# EAGLE board dualsmartplug (EAGLE 6.6.0)
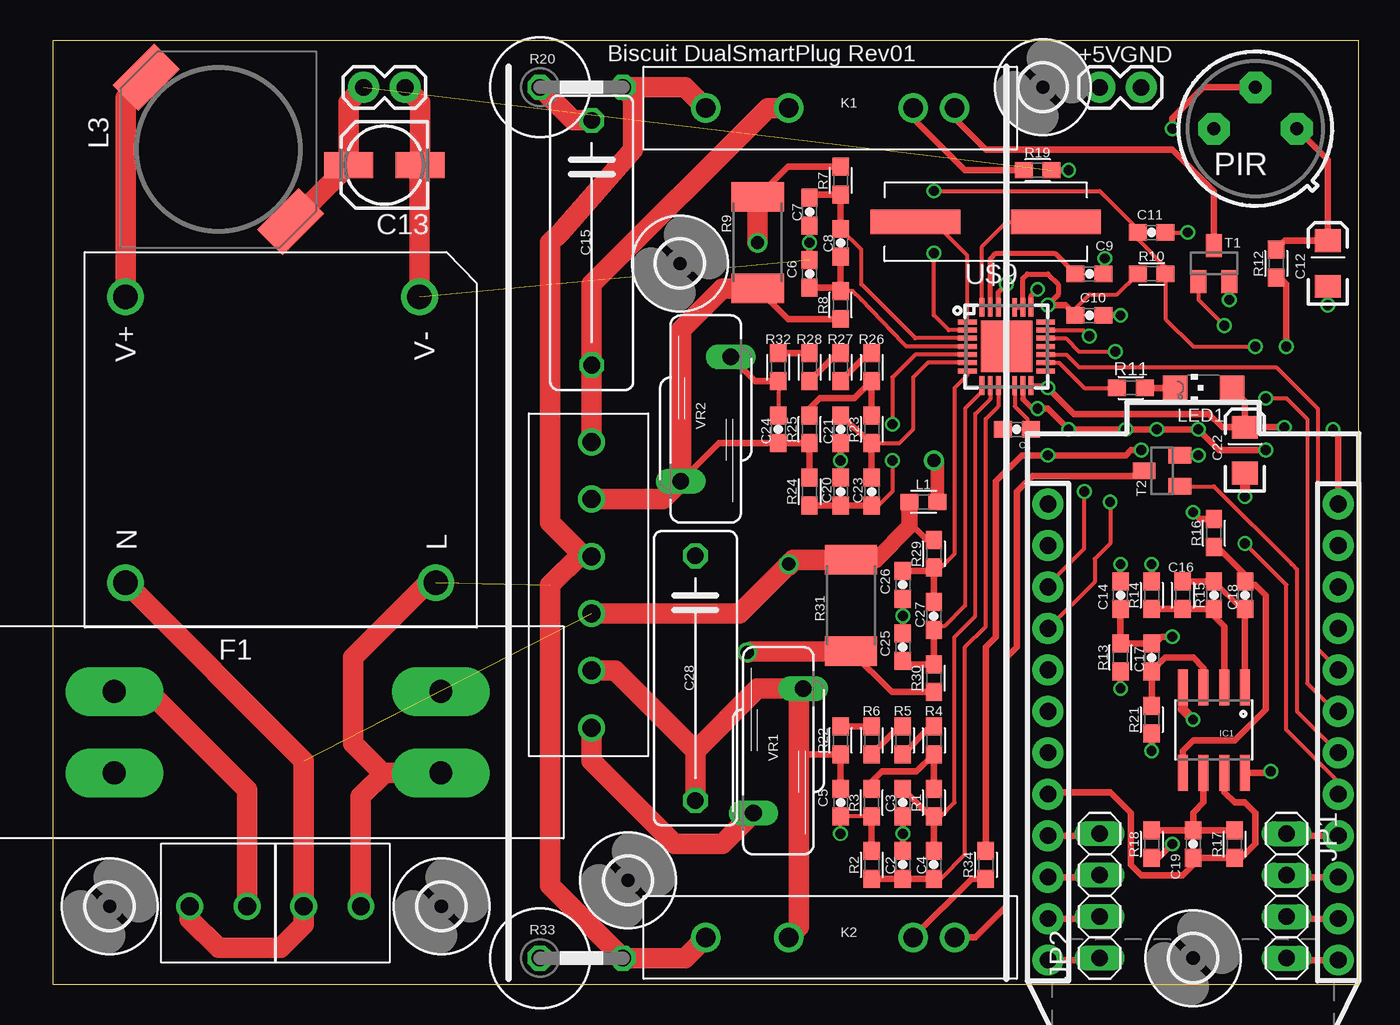
[diagram p0: board, top side]
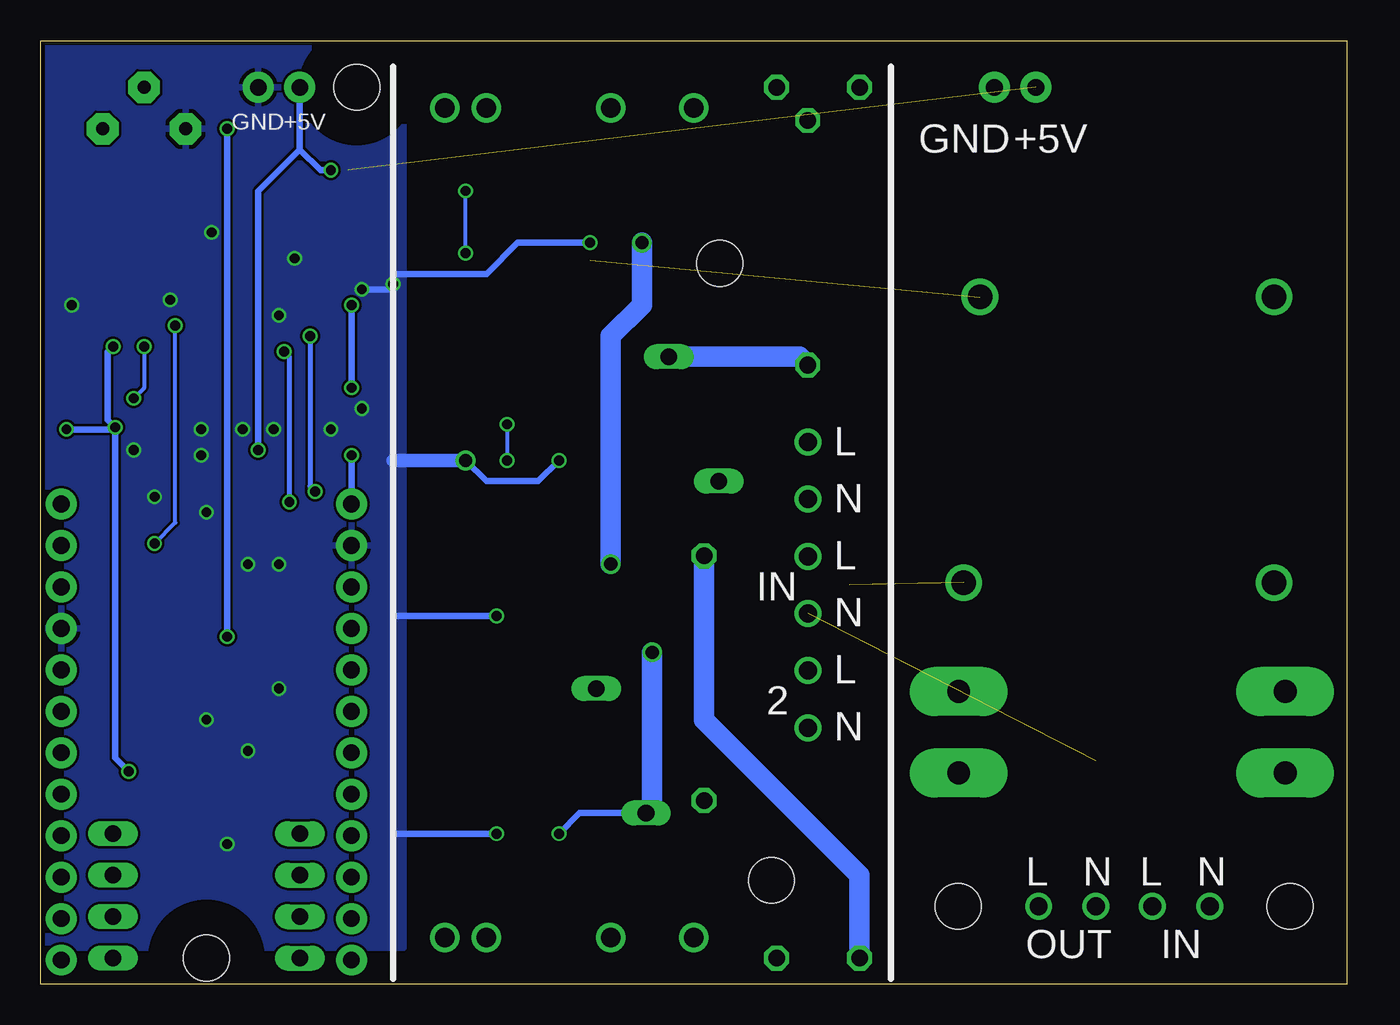
[diagram p1: board, bottom side, seen from below]

Size 79.99 x 57.77 mm. Coordinates in mm from the lower left corner, seen from the top.
Outline: 0,0 79.99,0 79.99,57.77 0,57.77 0,0
Copper layers (1*16): Top 0.035mm / dielectric 1.5mm / Bottom 0.035mm
Design rules "Fusion_eagle_rule_v1.1": minimum track width 6mil, minimum drill 12mil, track to track 6mil, track to pad 6mil, pad to pad 6mil, via to via 6mil, smd to smd 0mil, copper to edge 10mil, drill to drill 10mil, minimum pad ring 10mil, minimum via ring 6mil, stop-mask expansion 2mil, vias tented up to drill 100mil, thermal gap 10mil

## Footprints (pad centres in the part's own frame; a part is rotated, then mirrored left to right if it is on the bottom)
0603-CAP = smd 1.1 x 1: 1 -0.85,0; 2 0.85,0
EIA3216 = smd 1.4 x 1.6: A 1.4,0; C -1.4,0
153CLV-0505 = smd 3 x 1.6: + 2.2,0; - -2.2,0
C150-054X183 = drill 1.016 octagon: 1 -7.493,0; 2 7.493,0
SHURTER = drill 1.4 pad 3 long: P$5 -14,3; P$6 -14,-2; P$7 6,-2; P$8 6,3
SO08 = smd 0.61 x 2.21: 1 -1.905,-2.616; 2 -0.635,-2.616; 3 0.635,-2.616; 4 1.905,-2.616; 5 1.905,2.616; 6 0.635,2.616; 7 -0.635,2.616; 8 -1.905,2.616
1X04 = drill 1.016 long: 1 -3.81,0; 2 -1.27,0; 3 1.27,0; 4 3.81,0
1X02 = drill 1.016 pad 1.88: 1 0,0; 2 2.54,0
S216S02F = drill 1.2: 1 -8.89,0; 2 -3.81,0; 3 3.81,0; 4 6.35,0
0603 = smd 1.1 x 1: 1 -0.85,0; 2 0.85,0
ELLCTP = smd 3.6 x 2.2 rotated 315: 1 -4.428,-4.421; 2 4.411,4.418
CHIPLED_1206 = smd 1.5 x 1.5: A 0,-1.75; C 0,1.75
PIR_IRA-E700ST0 = drill 0.813 pad 1.93 octagon: DRAIN+ 2.54,0; GND -2.54,0; SOURCE 0,2.54
R2512 = smd 1.8 x 3.2: 1 -2.8,0; 2 2.8,0
0617V = drill 1.016 octagon: 1 -2.54,0; 2 2.54,0
SOT23 = smd 1 x 1.4: 1 -0.95,-1.1; 2 0.95,-1.1; 3 0,1.1
2,8 = hole 2.8: 0,0
PHOTON = drill 1.016 pad 1.88: 1 1.27,32.258; 2 1.27,29.718; 3 1.27,27.178; 4 1.27,24.638; 5 1.27,22.098; 6 1.27,19.558; 7 1.27,17.018; 8 1.27,14.478; 9 1.27,11.938; 10 1.27,9.398; 11 1.27,6.858; 12 1.27,4.318; 13 19.05,4.318; 14 19.05,6.858; 15 19.05,9.398; 16 19.05,11.938; 17 19.05,14.478; 18 19.05,17.018; 19 19.05,19.558; 20 19.05,22.098; 21 19.05,24.638; 22 19.05,27.178; 23 19.05,29.718; 24 19.05,32.258
VTX-214-001 = drill 1.5: P$L -8.75,-9.5; P$N -8.75,9.5; P$V+ 8.75,9.5; P$V- 8.75,-8.5
QFN28-5X5 = smd 1.15 x 0.3: P$1 -2.4,1.5; P$2 -2.4,1; P$3 -2.4,0.5; P$4 -2.4,0; P$5 -2.4,-0.5; P$6 -2.4,-1; P$7 -2.4,-1.5; P$15 2.4,-1.5; P$16 2.4,-1; P$17 2.4,-0.5; P$18 2.4,0; P$19 2.4,0.5; P$20 2.4,1; P$21 2.4,1.5 | smd 0.3 x 1.15: P$8 -1.5,-2.4; P$9 -1,-2.4; P$10 -0.5,-2.4; P$11 0,-2.4; P$12 0.5,-2.4; P$13 1,-2.4; P$14 1.5,-2.4; P$22 1.5,2.4; P$23 1,2.4; P$24 0.5,2.4; P$25 0,2.4; P$26 -0.5,2.4; P$27 -1,2.4; P$28 -1.5,2.4 | smd 3.15 x 3.15: P$29 0,0
S10K250 = drill 1.016 long: 1 -1.524,-3.81; 2 1.524,3.81
MOLEX-39357-6 = drill 1.1: P$1 -8.75,0; P$2 -5.25,0; P$3 -1.75,0; P$4 1.75,0; P$5 5.25,0; P$6 8.75,0
MOLEX-39357 = drill 1.1: P$1 -1.75,0; P$2 1.75,0
CRYSTAL-SMD-10.5X4.8-2PIN = smd 5.5 x 1.5: P$1 -4.3,0; P$2 4.3,0

## Placement (x,y rotation side)
C1  100nF  [0603-CAP]  59.05,33.97 180 top
C2  220pF  [0603-CAP]  52.07,7.3 270 top
C3  220pF  [0603-CAP]  52.07,11.11 270 top
C4  22nF  [0603-CAP]  53.98,7.3 270 top
C5  10nF  [0603-CAP]  48.26,11.11 270 top
C6  220pF  [0603-CAP]  46.36,43.5 270 top
C7  220pF  [0603-CAP]  46.36,47.31 270 top
C8  22nF  [0603-CAP]  48.26,45.4 270 top
C9  100nF  [0603-CAP]  63.5,43.5 180 top
C10  100nF  [0603-CAP]  63.5,40.96 180 top
C11  100nF  [0603-CAP]  67.31,46.04 180 top
C12  10uF  [EIA3216]  78.1,44.13 90 top
C13  47uF  [153CLV-0505]  20.32,50.16 180 top
C14  1nF  [0603-CAP]  65.4,23.81 90 top
C15  100n  [C150-054X183]  33.02,45.4 270 top
C16  15nF  [0603-CAP]  71.12,23.81 90 top
C17  1uF  [0603-CAP]  67.31,20 270 top
C18  1uF  [0603-CAP]  73.02,23.81 270 top
C19  15nF  [0603-CAP]  69.85,8.57 270 top
C20  220pF  [0603-CAP]  48.26,30.16 270 top
C21  220pF  [0603-CAP]  48.26,33.97 270 top
C22  10uF  [EIA3216]  73.02,32.7 90 top
C23  22nF  [0603-CAP]  50.16,30.16 270 top
C24  10nF  [0603-CAP]  44.45,33.97 270 top
C25  220pF  [0603-CAP]  52.07,20.64 270 top
C26  220pF  [0603-CAP]  52.07,24.45 270 top
C27  22nF  [0603-CAP]  53.98,22.54 270 top
C28  100n  [C150-054X183]  39.37,18.73 270 top
F1  T15A 1 1/4"  [SHURTER]  17.78,14.92 0 top
IC1  MCP6022  [SO08]  71.12,15.56 180 top
JP1  [1X04]  75.56,5.4 270 top
JP2  [1X04]  64.13,5.4 90 top
JP3  [1X02]  64.13,54.93 0 top
JP6  [1X02]  19.05,54.93 0 top
K1  S216S02FA  [S216S02F]  48.9,53.66 0 top
K2  S216S02FA  [S216S02F]  48.9,2.86 0 top
L1  INDUCTOR  [0603]  53.34,29.53 180 top
L3  5u6  [ELLCTP]  10.16,51.12 270 top
LED1  [CHIPLED_1206]  70.48,36.51 90 top
PIR  PIR_IRA-E700ST0  [PIR_IRA-E700ST0]  73.66,52.39 0 top
R1  1K  [0603]  53.98,11.11 270 top
R2  1K  [0603]  50.16,7.3 270 top
R3  1K  [0603]  50.16,11.11 90 top
R4  422K  [0603]  53.98,14.92 270 top
R5  422K  [0603]  52.07,14.92 270 top
R6  422K  [0603]  50.16,14.92 270 top
R7  1K  [0603]  48.26,49.21 270 top
R8  1K  [0603]  48.26,41.59 90 top
R9  0R002 2W 1%  [R2512]  43.18,45.4 90 top
R10  10K  [0603]  67.31,43.5 0 top
R11  100R  [0603]  66.04,36.51 0 top
R12  220K  [0603]  74.93,44.13 270 top
R13  470K  [0603]  65.4,20 90 top
R14  10K  [0603]  67.31,23.81 270 top
R15  150K  [0603]  69.21,23.81 270 top
R16  1M  [0603]  71.12,27.62 90 top
R17  150K  [0603]  72.39,8.57 90 top
R18  10K  [0603]  67.31,8.57 270 top
R19  220R  [0603]  60.33,49.85 180 top
R20  47R  [0617V]  32.38,54.93 0 top
R21  1M  [0603]  67.31,16.19 270 top
R22  422K  [0603]  48.26,14.92 90 top
R23  1K  [0603]  50.16,33.97 270 top
R24  1K  [0603]  46.36,30.16 270 top
R25  1K  [0603]  46.36,33.97 90 top
R26  422K  [0603]  50.16,37.78 270 top
R27  422K  [0603]  48.26,37.78 270 top
R28  422K  [0603]  46.36,37.78 270 top
R29  1K  [0603]  53.98,26.35 270 top
R30  1K  [0603]  53.98,18.73 90 top
R31  0R002 2W 1%  [R2512]  48.9,23.18 90 top
R32  422K  [0603]  44.45,37.78 90 top
R33  47R  [0617V]  32.38,1.59 0 top
R34  220R  [0603]  57.15,7.3 270 top
T1  BC846  [SOT23]  71.12,44.13 0 top
T2  BC846  [SOT23]  67.94,31.43 90 top
U$1  [2,8]  38.42,44.13 0 top
U$2  PHOTON_WITH_HEADERS  [PHOTON]  59.69,-2.86 0 top
U$4  [2,8]  23.81,4.76 0 top
U$5  [2,8]  3.49,4.76 0 top
U$6  VTX-214-001  [VTX-214-001]  13.97,33.34 90 top
U$7  [2,8]  60.64,54.93 0 top
U$8  [2,8]  69.85,1.59 0 top
U$9  CS5484  [QFN28-5X5]  58.42,39.05 0 top
U$10  [2,8]  35.24,6.35 0 top
VR1  S10K250  [S10K250]  44.45,14.29 0 top
VR2  S10K250  [S10K250]  40.01,34.61 0 top
X1  [MOLEX-39357-6]  33.02,24.45 270 top
X2  [MOLEX-39357]  17.13,4.76 180 top
X5  [MOLEX-39357]  10.16,4.76 180 top
Y1  4.096MHz  [CRYSTAL-SMD-10.5X4.8-2PIN]  57.15,46.67 180 top

## Library data of the parts
C1-C12 C20-C27 JP3 JP6 = SparkFun
C13 C15 C28 = rcl
C14 C16-C19 IC1 PIR U$2 U$9 = smartplug
F1 = smartplug; FARNELL_OC: 1162725; MPN: 0031.8231
JP1 JP2 = pinhead
K1 K2 = smartplug; FARNELL_OC: 1618480; MANUF_PART#: S216S02F; MOUSER_OC: 852-S216S02F
L1 R1-R8 R10-R19 R21-R30 R32 R34 U$6 X1 X2 X5 = Rebel
L3 = eva
LED1 = led
R9 R31 = SparkFun; FARNELL_OC: 2321760; MANUF_PART#: CRF2512-FV-R002ELF
R20 R33 = resistor
T1 T2 = transistor-neu-to92
U$1 U$4 U$5 U$7 U$8 U$10 = holes
VR1 VR2 = varistor; FARNELL_OC: 1004355; MANUF_PART#: B72210S0251K101
Y1 = SparkFun; FARNELL_OC: 2467740; MANUF_PART#: ABLS2-4.096MHZ-D4Y-T

## Nets
!CS_RST: C11.2 R10.2 U$2.19 U$9.P$2
!RELAY1: T1.1 U$2.17
!RELAY2: T2.1 U$2.18
+3V3: C10.2 C22.A IC1.8 LED1.A R10.1 R12.2 U$2.24 U$9.P$14 U$9.P$23 U$9.P$24
+5V: C13.+ JP3.1 JP6.1 L3.2 R19.1 R34.1 U$2.1
CS_D3: U$2.20 U$9.P$17
CS_D4: U$9.P$18
CS_RX: U$2.3 U$9.P$20
CS_TX: U$2.4 U$9.P$19
DGND: C2.1 C3.2 C6.1 C7.2 C9.1 C10.1 C11.1 C12.C C13.- C14.2 C20.1 C21.2 C22.C C25.1 C26.2 IC1.4 JP3.2 JP6.2 L1.1 PIR.GND R13.1 R14.1 R16.2 R18.2 R21.2 T1.2 T2.2 U$2.2 U$2.21 U$6.P$V- U$9.P$13 U$9.P$22 U$9.P$26
L1: C15.2 C24.1 K1.2 R32.1 VR2.2 X1.P$1
L2: C5.1 C28.2 K2.2 R22.1 VR1.2 X1.P$5
LIVE: F1.P$7 K1.1 K2.1 R20.2 R33.2 U$6.P$L X1.P$3 X2.P$1
LIVE_UNFUSED: F1.P$5 X5.P$1
N1: C24.2 R8.1 R9.1 R24.1 R25.1 VR2.1 X1.P$2
N2: C5.2 R2.1 R3.1 R30.1 R31.1 VR1.1 X1.P$6
N$1: U$9.P$1 Y1.P$2
N$2: U$9.P$28 Y1.P$1
N$3: C1.1 U$9.P$12
N$4: C1.2 U$9.P$11
N$5: C9.2 U$9.P$27
N$6: C12.A PIR.DRAIN+ R12.1
N$7: C2.2 C4.2 R2.2 U$9.P$10
N$8: C3.1 C4.1 R1.2 U$9.P$9
N$9: C6.2 C8.2 R8.2 U$9.P$4
N$10: C7.1 C8.1 R7.2 U$9.P$3
N$11: R1.1 R3.2 R4.2
N$12: C14.1 C17.1 PIR.SOURCE R13.2
N$13: R4.1 R5.2
N$14: R5.1 R6.2
N$15: C16.1 IC1.2 R14.2 R15.2
N$16: R11.1 U$9.P$16
N$17: K1.4 T1.3
N$18: C17.2 IC1.3 R21.1
N$19: LED1.C R11.2
N$20: C18.1 IC1.5 R16.1
N$21: L3.1 U$6.P$V+
N$22: K1.3 R19.2
N$23: C15.1 R20.1
N$24: C19.1 IC1.6 R17.2 R18.1
N$25: C16.2 C18.2 IC1.1 R15.1
N$27: JP2.1 U$2.12
N$28: JP2.2 U$2.11
N$29: JP2.3 U$2.10
N$30: JP2.4 U$2.9
N$31: JP1.4 U$2.13
N$32: JP1.3 U$2.14
N$33: JP1.2 U$2.15
N$34: JP1.1 U$2.16
N$35: R6.1 R22.2
N$36: C20.2 C23.2 R24.2 U$9.P$5
N$37: C21.1 C23.1 R23.2 U$9.P$6
N$38: R23.1 R25.2 R26.2
N$39: R26.1 R27.2
N$40: R27.1 R28.2
N$41: C25.2 C27.2 R30.2 U$9.P$8
N$42: C26.1 C27.1 R29.2 U$9.P$7
N$43: C28.1 R33.1
N$44: R28.1 R32.2
N$45: K2.4 T2.3
N$46: K2.3 R34.2
NEUTRAL: L1.2 R7.1 R9.2 R29.1 R31.2 U$6.P$N X1.P$4 X2.P$2 X5.P$2
PIR_SIG: C19.2 IC1.7 R17.1 U$2.8
VBAT: U$2.22

## Tracks (layer width: path | path; a pad name or v marks a point on that pad's centre or on a via)
!CS_RST  (via drill 0.6)
  Top 0.254: v53.98,48.58 64.13,48.58 66.46,46.25 C11.2 66.46,45.62 68.16,43.92 R10.2 68.16,40.74 69.85,39.05 v73.66,39.05 | U$9.P$2 54.88,40.05 53.98,40.96 v53.98,44.77 | v74.29,35.88 75.56,35.88 76.83,34.61 76.83,18.41 78.55,16.7 U$2.19
  Bottom 0.254: v53.98,44.77 v53.98,48.58 | v73.66,39.05 73.66,36.51 v74.29,35.88
!RELAY1  (via drill 0.6)
  Top 0.254: U$2.17 78.74,12.38 75.56,15.56 75.56,24.45 v73.02,26.99 | T1.1 70.17,41.91 v71.75,40.32
  Bottom 0.254: v73.02,26.99 71.75,28.26 v71.75,40.32
!RELAY2
  Top 0.254: T2.1 71.12,30.48 75.88,25.72 76.2,25.4 76.2,16.7 U$2.18
+3V3  (via drill 0.6)
  Top 0.254: C10.2 62.65,41.38 63.5,42.23 65.19,42.23 R10.1
  Top 0.305: v60.96,41.59 61.6,42.23 61.6,42.86 60.96,43.5 59.69,43.5 59.42,43.23 U$9.P$23 U$9.P$24 | U$9.P$14 60.82,36.65
  Top 0.406: R12.2 75.14,43.28 75.56,42.86 v75.56,39.05 | v60.96,41.59 62.02,41.59 C10.2 | C22.A 71.62,34.1 70.8,34.92 62.55,34.92 v60.96,36.51 60.82,36.65 | C22.A v75.43,34.1 | C22.A 73.02,35.72 LED1.A | IC1.8 74.22,12.94 v74.61,13.02 | U$2.24 78.74,33.66 v78.42,33.97
  Bottom 0.406: v60.96,36.51 v60.96,41.59 | v75.56,39.05 75.88,38.74 75.88,34.55 v75.43,34.1 | v78.42,33.97 75.56,33.97 v75.43,34.1 | v75.43,34.1 75.43,13.84 v74.61,13.02
+5V  (via drill 0.6)  (1 unrouted)
  Top 0.406: R34.1 57.15,20.64 57.79,21.27 57.79,30.8 59.37,32.38 v60.96,32.38 65.72,32.38 66.04,32.7 v66.67,32.7 | R19.1 v62.23,49.85
  Top 1.27: L3.2 14.66,46.71 C13.+ 18.12,54 JP6.1
  Bottom 0.406: v62.23,49.85 62.87,49.85 64.13,51.12 | 64.13,51.12 JP3.1 | v66.67,32.7 66.67,48.58 64.13,51.12 | U$2.1 v60.96,32.38
CS_D3
  Top 0.254: U$9.P$17 62.1,38.55 62.87,37.78 74.93,37.78 77.47,35.24 77.47,20.51 U$2.20
CS_RX  (via drill 0.6)
  Top 0.254: U$9.P$20 63.13,40.05 v63.5,39.69 | U$2.3 60.96,24.45 63.18,26.67 v63.18,30.16
  Bottom 0.305: v63.5,39.69 63.5,30.48 v63.18,30.16
CS_TX  (via drill 0.6)
  Top 0.254: U$9.P$19 62.05,39.55 62.87,38.74 v65.09,38.74 | v64.77,29.53 64.77,26.99 63.82,26.04 63.82,24.64 U$2.4
  Bottom 0.305: v65.09,38.74 64.77,38.42 v64.77,29.53
DGND  (via drill 0.6, 0.8)  (1 unrouted)
  Top 0.254: C11.1 v69.53,46.04
  Top 0.305: U$9.P$22 59.92,42.14 v60.33,42.55 | U$9.P$26 57.92,42.36 v58.42,42.86 | U$9.P$13 59.42,35.83 60.01,35.24 v60.33,35.24
  Top 0.406: R14.1 v67.31,25.72 | R13.1 v65.4,18.1 | R21.2 v67.31,14.29 | C12.C v78.1,41.59 | T1.2 v72.07,41.91 | C14.2 v65.4,25.72 | R18.2 67.73,7.72 v68.58,8.57 | T2.2 v70.16,32.38 v70.17,32.38 | C20.1 v48.26,32.07 C21.2 | C2.1 v52.07,9.21 C3.2 | C25.1 v52.07,22.54 C26.2 | C7.2 v46.36,45.4 C6.1 | C10.1 v65.4,40.96 | C9.1 64.35,44.35 v64.45,44.45 | R16.2 70.27,28.47 v69.85,28.89 | v60.33,35.24 60.96,35.24 v62.23,33.97 v65.72,33.97 v70.17,33.97 71.44,32.7 v74.29,32.7
  Top 0.61: IC1.4 69.21,16.83 v69.85,16.19 | C22.C v73.02,29.84
  Top 0.813: L1.1 54.19,31.85 v53.98,32.07
  Top 1.27: U$6.P$V- 22.47,50.12 C13.- 22.52,54 JP6.2
  Bottom 0.406: v60.33,42.55 58.74,42.55 v58.42,42.86 58.42,32.7 | v52.07,9.21 58.42,9.21 | v52.07,22.54 58.42,22.54 | v46.36,45.4 50.8,45.4 52.7,43.5 58.42,43.5 | v48.26,32.07 49.53,30.8 52.7,30.8 v53.98,32.07
  Bottom 0.813: v53.98,32.07 58.42,32.07
  other vias: 67.63,33.97
  pour Bottom: 57.79,58.1 88.9,58.1 88.9,2.22 57.79,2.22
L1
  Top 0.254: R32.1 C24.1
  Top 0.406: R32.1 43.01,36.93 VR2.2
  Top 1.27: K1.2 43.81,53.66 33.02,42.86 C15.2 X1.P$1
  Bottom 1.27: VR2.2 33.53,38.42 C15.2
L2
  Top 0.254: 45.94,14.07 45.72,14.29
  Top 0.406: C5.1 R22.1 45.94,14.07
  Top 1.27: 39.37,11.49 C28.2 39.37,14.29 | K2.2 45.72,3.49 45.72,14.29 45.72,17.84 VR1.2 43.18,18.1 39.37,14.29 | X1.P$5 34.46,19.2 39.37,14.29
LIVE  (1 unrouted)
  Top 1.27: K1.1 38.73,54.93 R20.2 35.56,54.29 35.56,51.12 31.12,46.04 30.48,45.4 30.48,28.26 32.38,26.35 | K2.1 38.73,1.59 R33.2 30.48,6.03 30.48,24.45 32.38,26.35 | F1.P$7 20.32,12.92 | 20.32,12.92 20.23,12.92 18.41,14.73 18.41,20 23,24.59 U$6.P$L | X2.P$1 18.88,11.48 20.32,12.92 | X1.P$3 32.54,26.2 32.38,26.35
LIVE_UNFUSED
  Top 1.27: F1.P$5 5.89,17.92 11.91,11.9 X5.P$1
N1
  Top 0.406: R24.1 R25.1 C24.2 40.81,33.12 VR2.1 | R8.1 45.04,40.74 R9.1
  Top 1.27: R9.1 41.02,42.6 38.48,40.07 VR2.1 37.38,29.7 X1.P$2
N2  (via drill 0.6, 0.8)
  Top 0.254: R3.1 C5.2 v48.26,9.21
  Top 0.406: R2.1 R3.1 | R30.1 51.39,17.88 R31.1
  Top 1.27: X1.P$6 33.02,13.65 38.1,8.57 41.02,8.57 VR1.1 | R31.1 42.8,20.38 v42.55,20.32
  Bottom 0.406: VR1.1 46.99,10.48 v48.26,9.21
  Bottom 1.27: v42.55,20.32 42.55,10.73 VR1.1
N$1
  Top 0.254: U$9.P$1 56.02,44.63 53.98,46.67 Y1.P$2
N$2
  Top 0.254: Y1.P$1 58.42,46.67 56.92,45.17 U$9.P$28
N$3
  Top 0.254: U$9.P$12 58.92,35.38 59.69,34.61 59.69,34.19 C1.1
N$4
  Top 0.254: U$9.P$11 58.42,34.19 C1.2
N$5
  Top 0.305: U$9.P$27 57.42,44.4 57.79,44.77 61.38,44.77 C9.2
N$6
  Top 0.406: PIR.DRAIN+ 78.1,50.48 C12.A 75.48,45.53 R12.1
N$7
  Top 0.254: C2.2 C4.2 54.4,6.45 55.88,7.94 55.88,20.64 57.15,21.91 57.15,34.61 57.92,35.38 U$9.P$10
  Top 0.406: R2.2 C2.2 | C4.2 52.49,6.45
N$8
  Top 0.254: U$9.P$9 57.42,35.83 56.52,34.92 56.52,22.54 55.24,21.27 55.24,11.11 54.4,10.26 R1.2 53.77,10.26
  Top 0.406: C4.1 R1.2 | 53.77,10.26 C3.1
N$9
  Top 0.254: R8.2 49,42.44 49.53,41.91 52.07,39.27 52.29,39.05 U$9.P$4
  Top 0.406: C6.2 48.05,42.65 R8.2 C8.2
N$10
  Top 0.254: C8.1 49.53,44.98 49.53,42.86 52.84,39.55 U$9.P$3
  Top 0.406: C8.1 R7.2 46.56,48.36 C7.1
N$11
  Top 0.254: R4.2 53.98,13.87
  Top 0.406: R1.1 R4.2 52.92,13.02 50.8,13.02 50.16,12.38 R3.2
N$12  (via drill 0.6)
  Top 0.305: C17.1 67.52,20.85
  Top 0.406: C14.1 R13.2 C17.1 | 67.52,20.85 67.94,21.27 v68.58,21.27 | v68.58,52.39 68.58,53.02 70.48,54.93 PIR.SOURCE
  Bottom 0.406: v68.58,21.27 v68.58,52.39
N$13
  Top 0.254: R4.1 53.77,15.77
  Top 0.406: 53.77,15.77 R5.2
N$14
  Top 0.254: R5.1 51.87,15.77
  Top 0.406: 51.87,15.77 R6.2
N$15
  Top 0.406: IC1.2 71.75,21.91 71.12,22.54 C16.1 R15.2 R14.2
N$16
  Top 0.254: R11.1 63.18,36.51 61.64,38.05 U$9.P$16
N$17
  Top 0.406: K1.4 55.24,53.02 57.15,51.12 68.58,51.12 71.12,48.58 T1.3
N$18
  Top 0.406: R21.1 C17.2 68.16,20 69.85,20 70.48,19.37 IC1.3
N$19
  Top 0.406: R11.2 LED1.C
N$20
  Top 0.406: IC1.5 69.21,14.29 69.85,14.92 72.39,14.92 74.29,16.83 74.29,23.81 73.66,24.45 73.24,24.45 C18.1 73.02,25.08 71.33,26.77 R16.1
N$21
  Top 1.27: U$6.P$V+ 4.47,54.28 L3.1
N$22
  Top 0.406: R19.2 55.88,49.85 52.7,53.02 K1.3
N$23
  Top 1.27: C15.1 31.88,52.9 R20.1
N$24
  Top 0.406: IC1.6 70.48,11.11 69.85,10.48 C19.1 | C19.1 R18.1 | R17.2 C19.1
N$25
  Top 0.305: 72.82,22.96 C16.2
  Top 0.406: C16.2 R15.1 | 72.82,22.96 C18.2 IC1.1
N$27
  Top 0.406: U$2.12 64.01,1.46 JP2.1
N$28
  Top 0.406: U$2.11 64.01,4 JP2.2
N$29
  Top 0.406: U$2.10 64.01,6.54 JP2.3
N$30
  Top 0.406: U$2.9 64.01,9.08 JP2.4
N$31
  Top 0.406: U$2.13 75.69,1.46 JP1.4
N$32
  Top 0.406: U$2.14 75.69,4 JP1.3
N$33
  Top 0.406: U$2.15 75.69,6.54 JP1.2
N$34
  Top 0.406: U$2.16 75.69,9.08 JP1.1
N$35
  Top 0.406: R6.1 R22.2
N$36  (via drill 0.6)
  Top 0.254: U$9.P$5 52.84,38.55 51.44,37.15 v51.44,34.29 | 50.38,29.53 C23.2 50.59,29.31 51.44,30.16 v51.44,32.07
  Top 0.406: R24.2 C20.2 C23.2
  Bottom 0.254: v51.44,34.29 v51.44,32.07
N$37
  Top 0.254: R23.2 51.86,33.12 52.7,33.97 52.7,37.15 53.61,38.05 U$9.P$6
  Top 0.406: C21.1 R23.2 C23.1
N$38
  Top 0.254: R25.2 46.36,35.24
  Top 0.406: R23.1 R26.2 49.11,35.88 46.99,35.88 46.36,35.24
N$39
  Top 0.254: R26.1 49.96,38.63
  Top 0.406: 49.96,38.63 R27.2
N$40
  Top 0.254: R27.1 48.05,38.63
  Top 0.406: 48.05,38.63 R28.2
N$41
  Top 0.254: 52.5,19.58 C25.2 | U$9.P$8 56.92,36.28 55.88,35.24 55.88,23.18 54.61,21.91 54.19,21.91 C27.2
  Top 0.406: 52.5,19.58 R30.2 C27.2
N$42
  Top 0.254: 54.18,25.3 R29.2 | U$9.P$7 56.02,37.29 55.24,36.51 55.24,26.35 54.4,25.5 R29.2 | 54.19,25.72 R29.2
  Top 0.406: C27.1 R29.2 | C26.1 54.18,25.3
N$43
  Bottom 1.27: R33.1 29.84,6.67 39.37,16.19 C28.1
N$44
  Top 0.406: R28.1 R32.2
N$45
  Top 0.406: K2.4 56.52,2.86 58.42,4.76 58.42,20 59.05,20.64 59.05,30.16 60.01,31.12 66.36,31.12 T2.3
N$46
  Top 0.406: K2.3 56.3,6.45 R34.2
NEUTRAL  (via drill 0.8)  (1 unrouted)
  Top 0.406: R7.1 45.04,50.06 R9.2 | R29.1 53.55,27.2 52.49,28.26
  Top 1.016: L1.2 52.49,28.26 52.49,28.04 50.43,25.98 R31.2
  Top 1.27: U$6.P$N 15.38,13.68 X2.P$2 15.38,3.63 13.97,2.22 10.16,2.22 8.41,3.97 X5.P$2 | R9.2 v43.18,45.4 | v45.09,25.72 45.09,25.64 | R31.2 45.34,25.98 v45.09,25.72 | X1.P$4 42.06,22.7 v45.09,25.72
  Bottom 1.27: v43.18,45.4 43.18,41.59 45.09,39.69 v45.09,25.72
PIR_SIG
  Top 0.406: IC1.7 71.75,11.75 72.39,11.11 73.02,11.11 73.66,10.48 73.66,8.57 72.81,7.72 R17.1 C19.2 69.85,7.3 69.21,6.67 66.67,6.67 66.04,7.3 66.04,10.48 64.77,11.75 61.09,11.75 U$2.8

## Text on the board
tPlace: +5V | GND | Biscuit DualSmartPlug Rev01
bPlace: +5V | GND | +5V | GND | L | N | L | IN | N | L | 2 | N | N | L | N | L | IN | OUT